# Altium PCB 2015_AX12DUPLICATOR.PcbDoc
Units mil, origin at the board's own origin, x right, y up, seen from the top; angles counter-clockwise.
Board outline 1318.9 x 1318.9 mil, 4 copper layers (1-TOP, 2-SIGNAL, 3-GND, 4-BOT), stack 68 mil thick; 16 components, 4 nets, 37 pads, 0 vias.
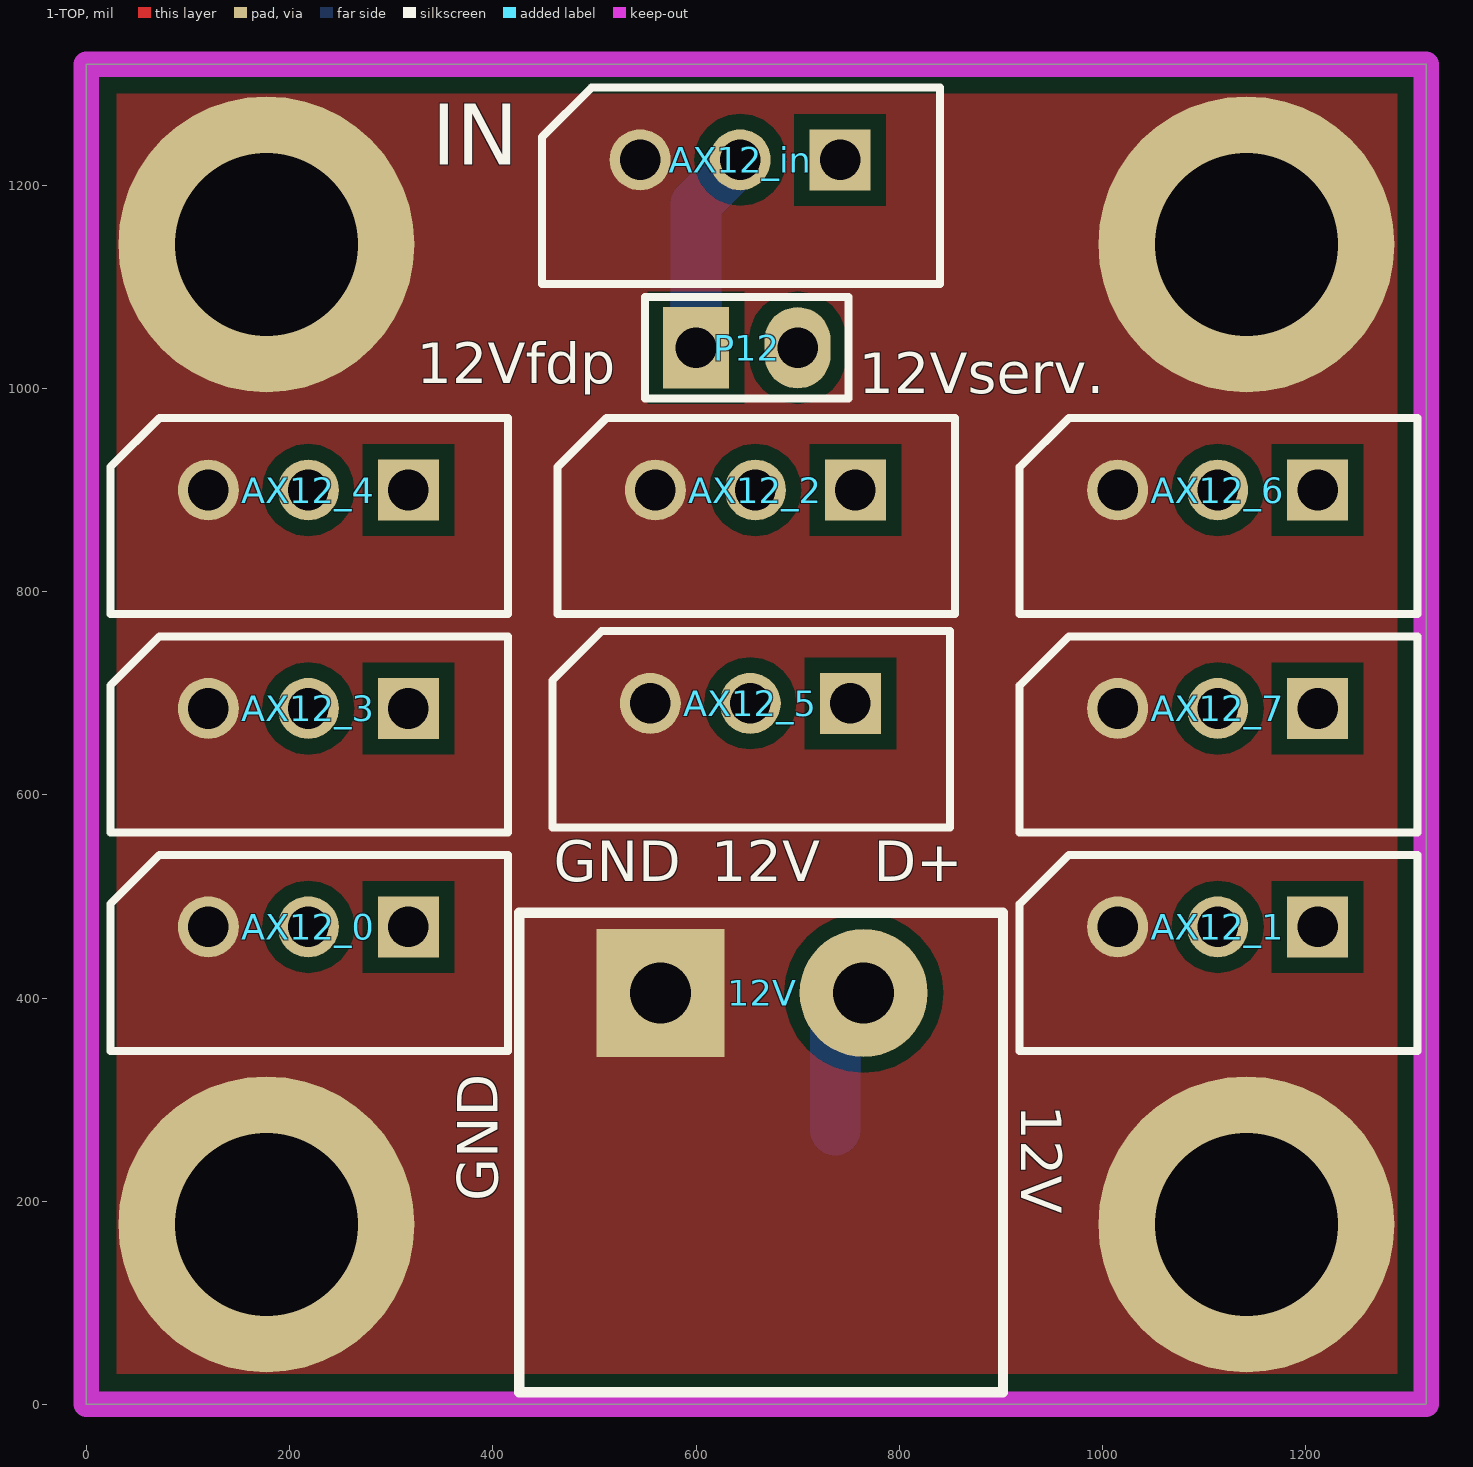
[diagram p0: 1-TOP view]
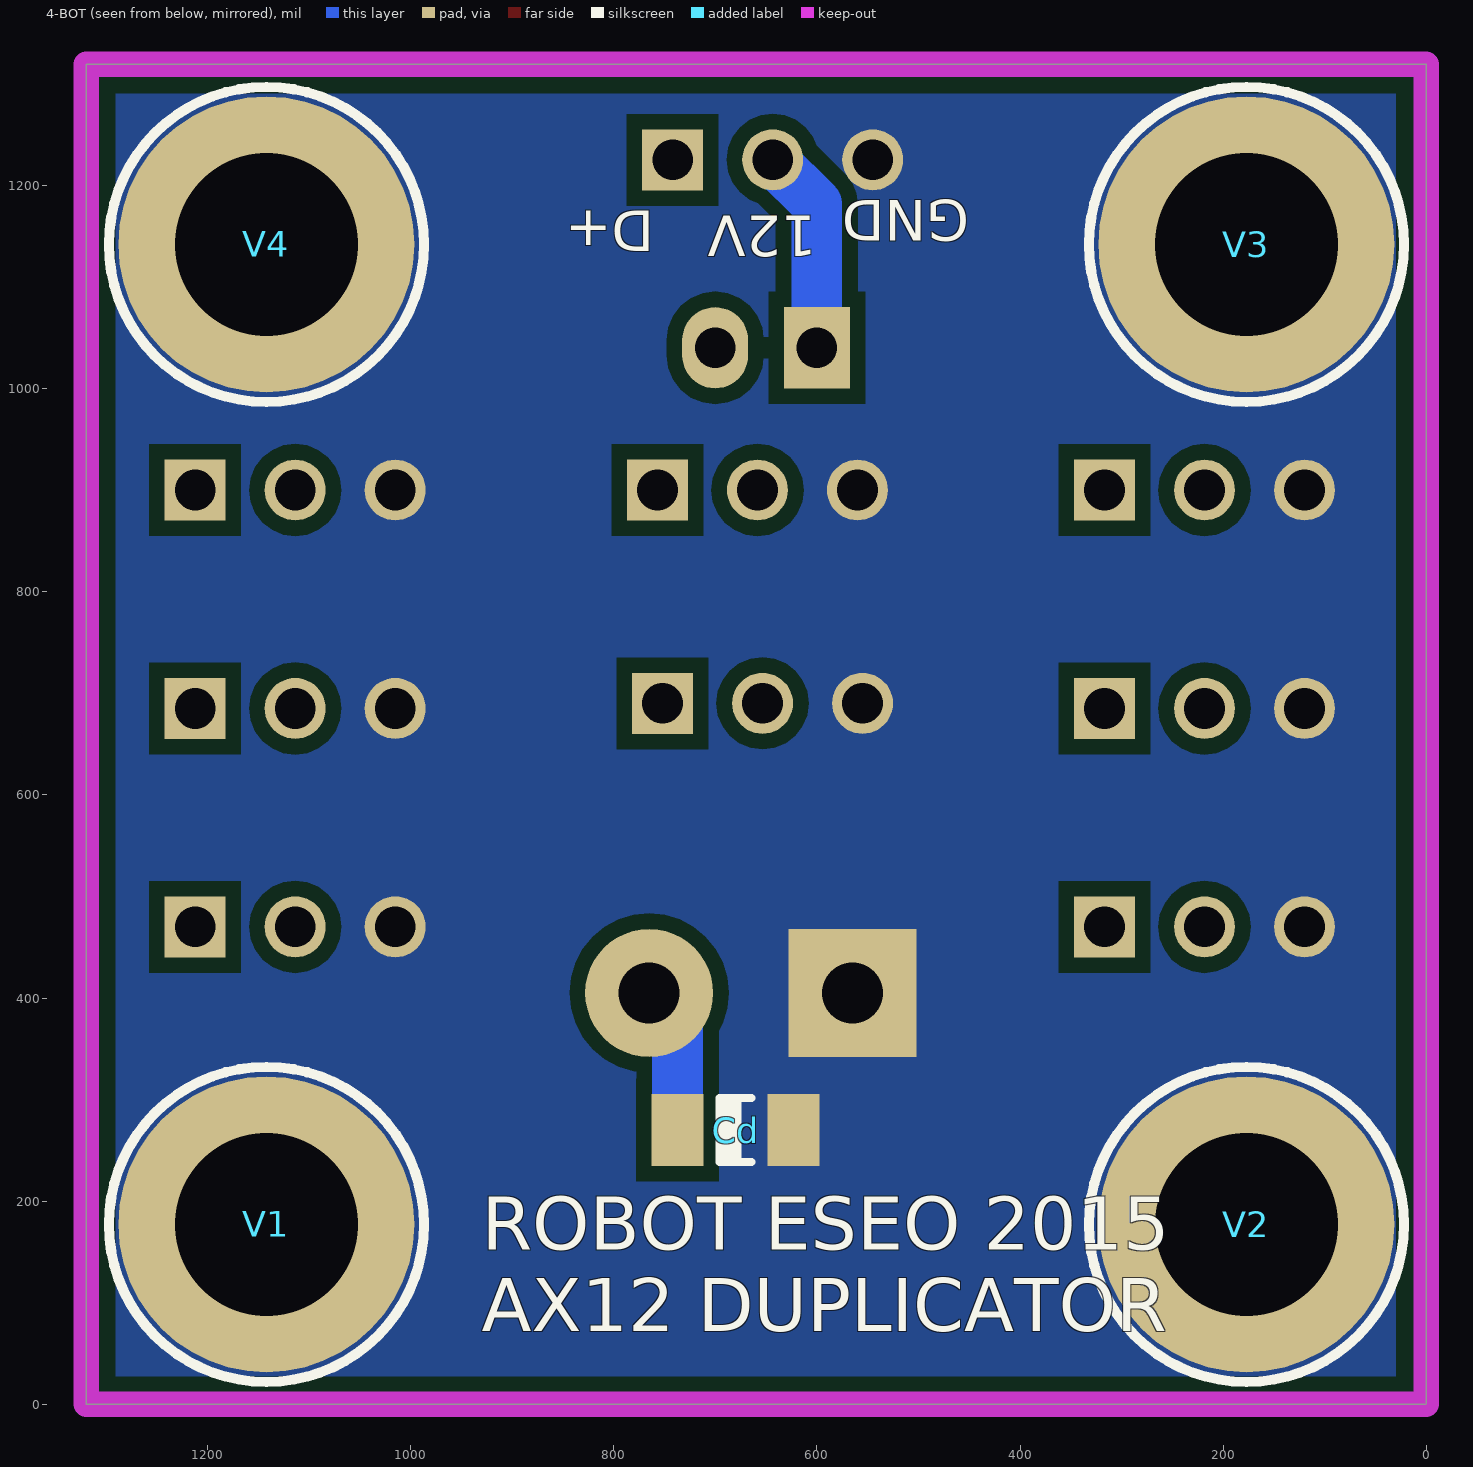
[diagram p1: 4-BOT view, seen from below]
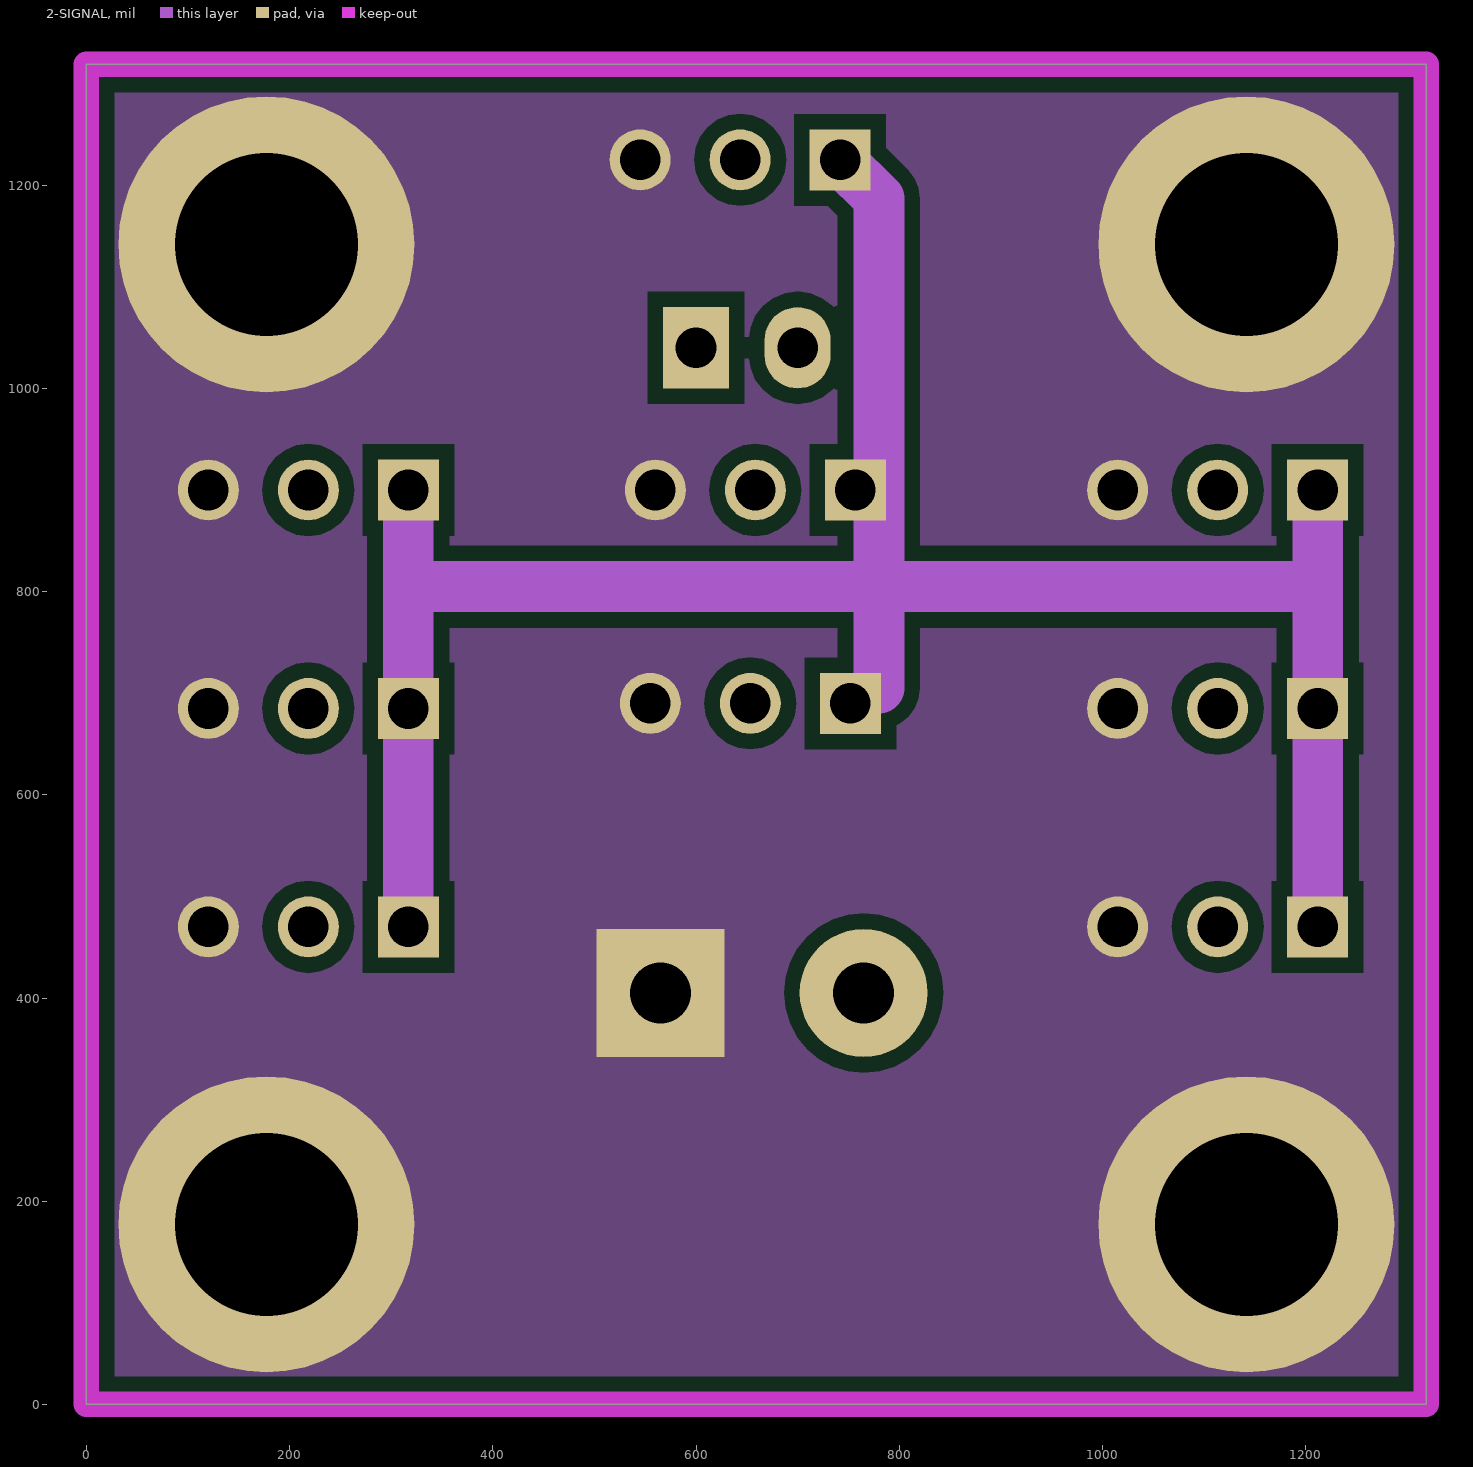
[diagram p2: 2-SIGNAL]
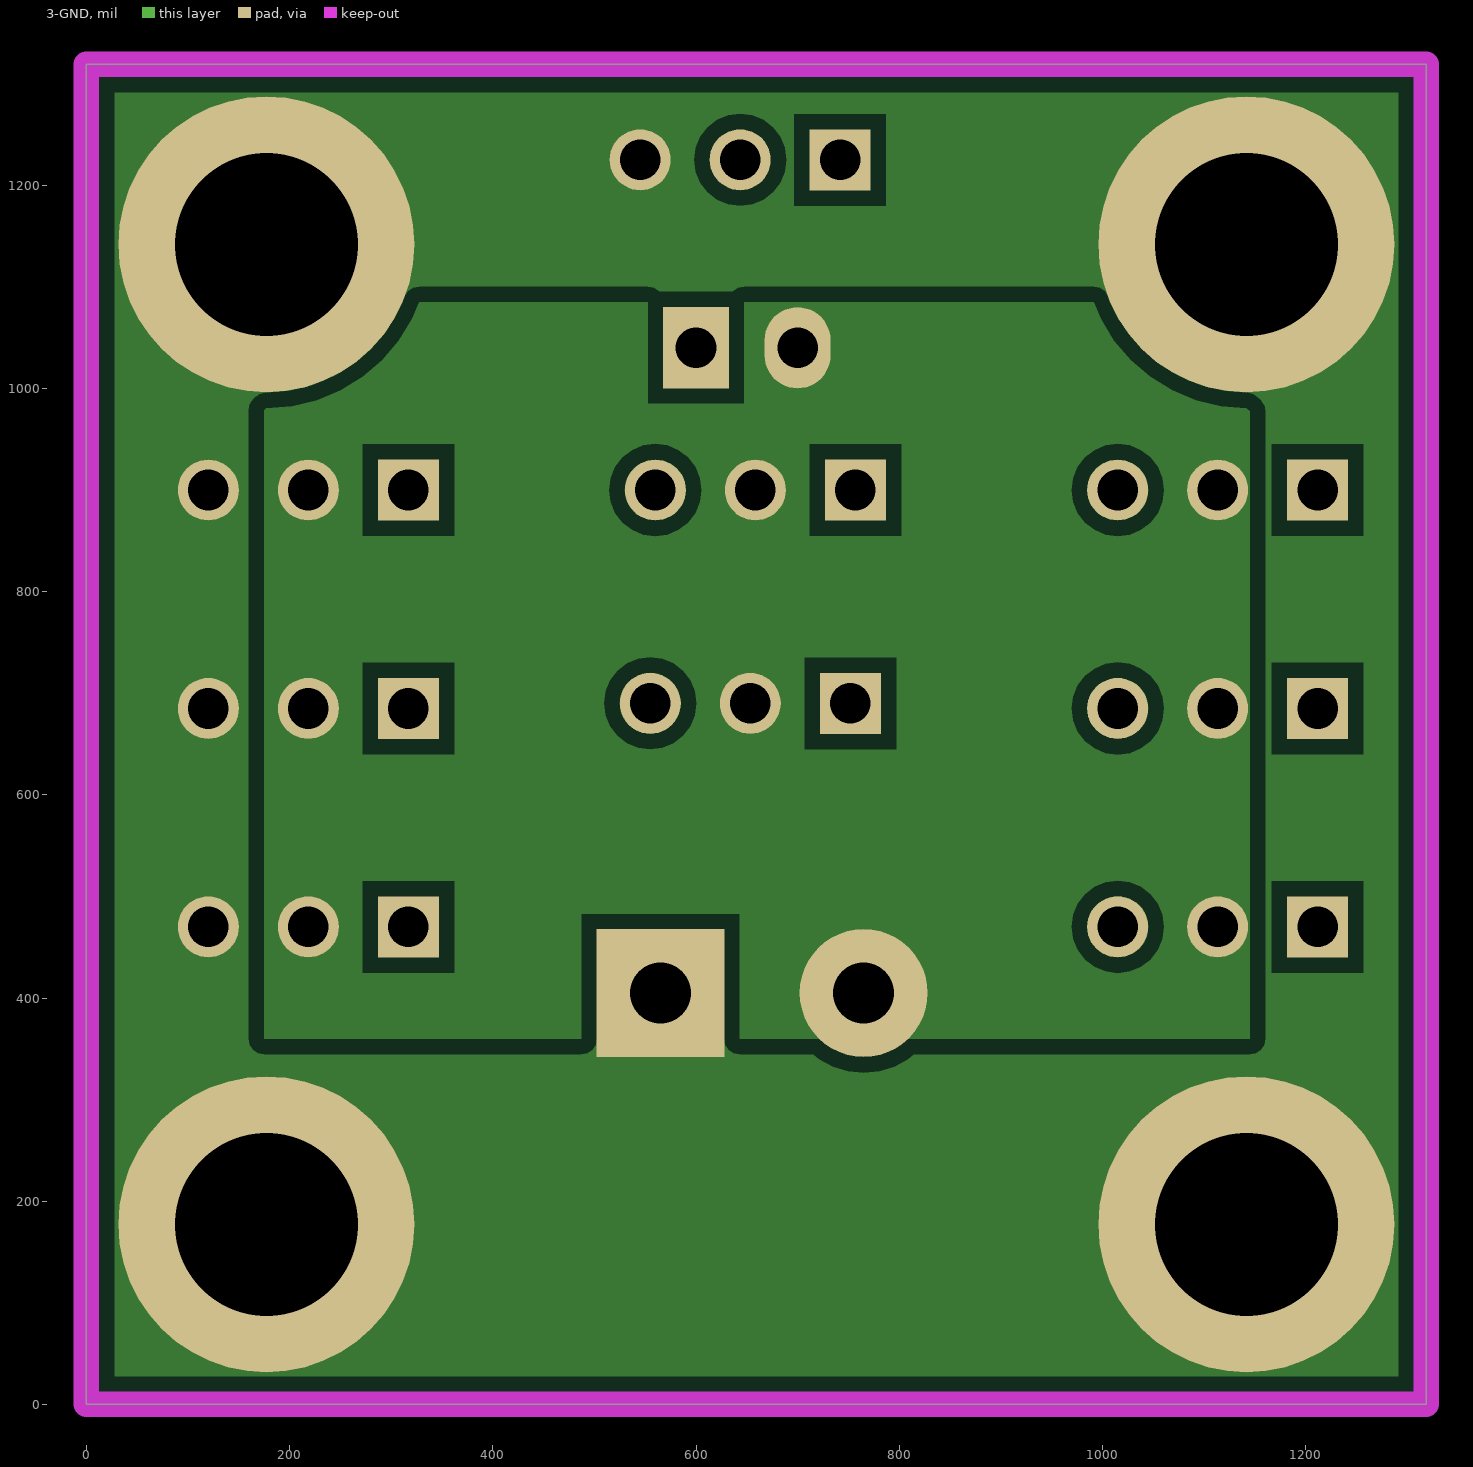
[diagram p3: 3-GND]
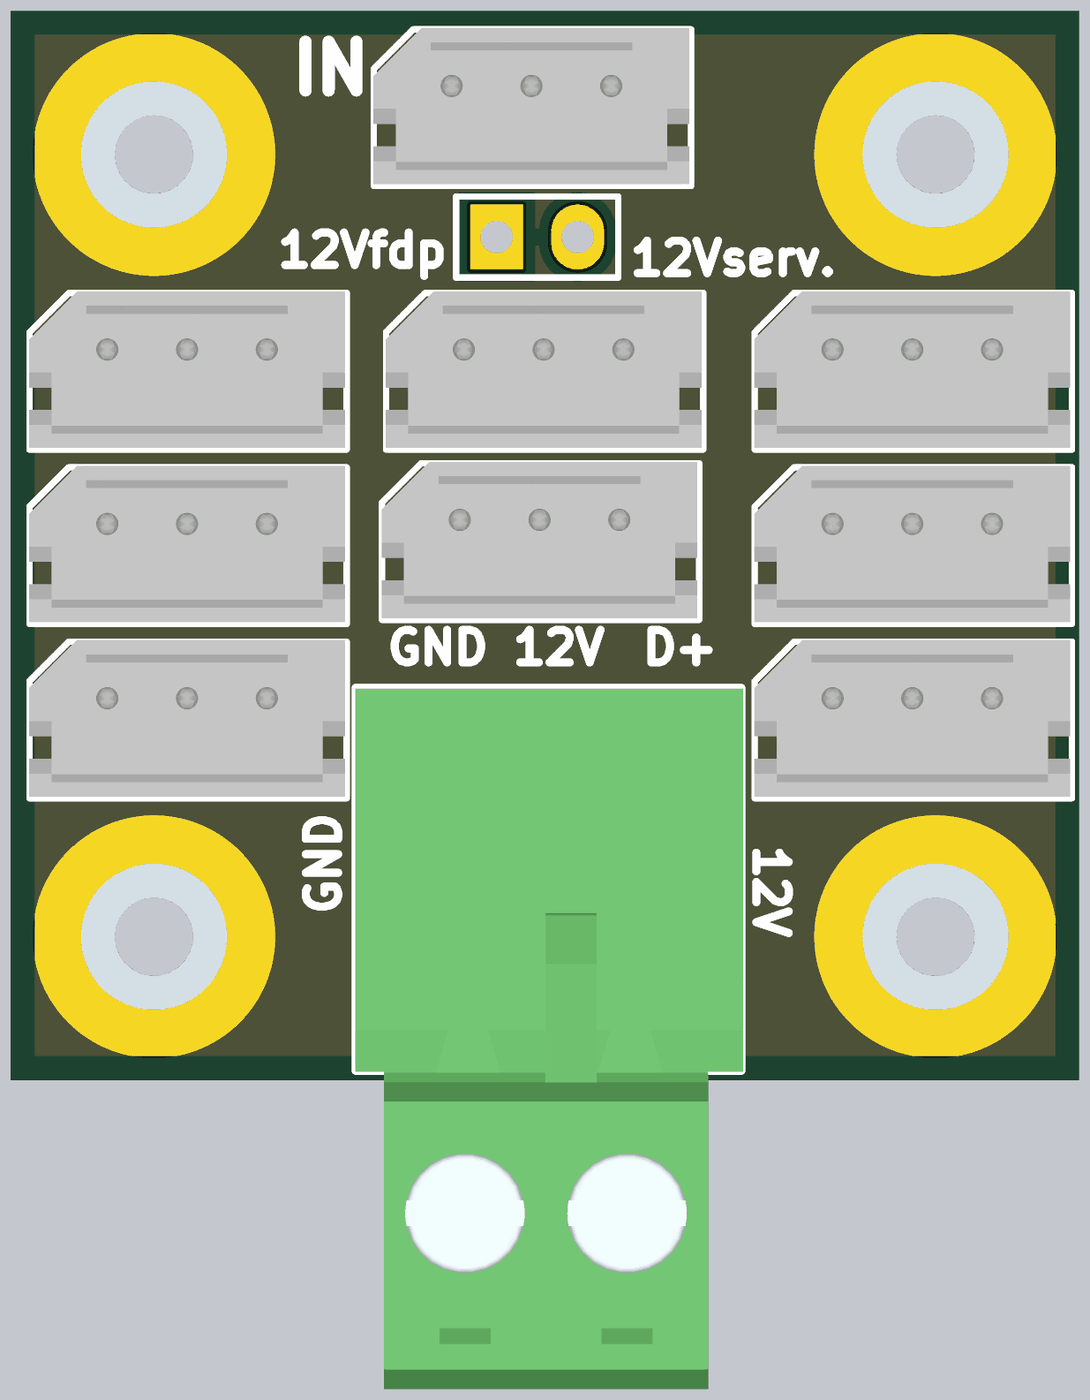
[diagram p4: 3D render of the assembled board from above, using the file's embedded part models]

## Layer stack, top to bottom
Top Solder: solder mask 0.4, Solder Resist, Dk 3.5
1-TOP: signal copper 1.4
Dielectric1: core 20.8, FR-4, Dk 4.8
2-SIGNAL: signal copper 1.4
Dielectric2: prepreg 20.8, FR-4, Dk 4.8
3-GND: signal copper 1.4
Dielectric3: core 20.8, FR-4, Dk 4.8
4-BOT: signal copper 1.4
Bottom Solder: solder mask 0.4, Solder Resist, Dk 3.5

## Board outline
0,0 1318.9,0 1318.9,1318.9 0,1318.9

## Design rules (kind name [scope] priority, off if disabled: settings)
Clearance Clearance_1 [InNamedPolygon('1-GND') Or  InNamedPolygon('2-GND') Or  InNamedPolygon('3-GND') Or InNamedPolygon('4-GND') Or InNamedPolygon('3-12V')] p1: gap=15
Clearance [All] p2: gap=7
FabricationTestpoint [(IsPad And (OnTopLayer Or OnBottomLayer))] p1: side=3 testpointundercomponent=TRUE minsize=40 maxsize=100 preferedsize=60 minholesize=0 maxholesize=40 preferedholesize=32 testpointgrid=1 allowsidetop=TRUE allowsidebottom=TRUE usegrid=TRUE gridtolerance=0.01
HoleSize [All] p1: absolutevalues=TRUE maxlimit=200 minlimit=1 maxpercent=80.000 minpercent=20.000
PlaneConnect [All] p1: planeconnectstyle=Direct reliefexpansion=20 reliefentries=4 reliefconductorwidth=10 reliefairgap=10
PolygonConnect [All] p1: connectstyle=Direct reliefconductorwidth=10 reliefentries=4 polygonreliefangle="90 Angle" airgapwidth=10
RoomDefinition 2015_AX12DUPLICATOR [InComponentClass('2015_AX12DUPLICATOR')] p1: confinementstyle=ConfineIn formatcopy=TRUE lockcomponents=FALSE outline 1310,920 1695,920 1695,260 1310,260
RoutingVias [All] p1: holewidth=28 width=50 viastyle="Through Hole" minholewidth=28 minwidth=50 maxholewidth=28 maxwidth=50
SilkToSolderMaskClearance SilkscreenOverComponentPads [IsPad] p1: minsilkscreentomaskgap=10 clearancetoexposedcopper=TRUE
SolderMaskExpansion [All] p1: expansion=4
Width [All] p1: maxlimit=200 minlimit=10 preferedwidth=15
25 further rules are at their usual default settings.

## Components (designator, comment, footprint, x,y, rotation, side; value= is the part's Value field where it differs from the comment)
12V "BARRETTE2" BORNIER2_HORIZ 765,405 r180 top
AX12_0 "MOLEX 22-03-5035" MOLEX3_2.5MM 120,470 r0 top
AX12_1 "MOLEX 22-03-5035" MOLEX3_2.5MM 1015,470 r0 top
AX12_2 "MOLEX 22-03-5035" MOLEX3_2.5MM 560,900 r0 top
AX12_3 "MOLEX 22-03-5035" MOLEX3_2.5MM 120,685 r0 top
AX12_4 "MOLEX 22-03-5035" MOLEX3_2.5MM 120,900 r0 top
AX12_5 "MOLEX 22-03-5035" MOLEX3_2.5MM 555,690 r0 top
AX12_6 "MOLEX 22-03-5035" MOLEX3_2.5MM 1015,900 r0 top
AX12_7 "MOLEX 22-03-5035" MOLEX3_2.5MM 1015,685 r0 top
AX12_in "MOLEX 22-03-5035" MOLEX3_2.5MM 545,1225 r0 top
Cd "10uF" C1206_N 680,270 r180 bottom
P12 "Jumper SIP 2.54" HDR1X2 600,1040 r0 top
V1 "Entretoise WURTH CMS" ENTRETOISE_CMS 1141.73,177.17 r180 bottom
V2 "Entretoise WURTH CMS" ENTRETOISE_CMS 177.17,177.17 r180 bottom
V3 "Entretoise WURTH CMS" ENTRETOISE_CMS 177.17,1141.73 r180 bottom
V4 "Entretoise WURTH CMS" ENTRETOISE_CMS 1141.73,1141.73 r180 bottom

## Footprints (in the part's own frame and the unit in brackets; to place one, negate y for a bottom-side part, rotate by r counter-clockwise, add the part's x,y. Pads: shape width x height; smd on the part's side, far side on the other; paste and mask are expansions set on the pad)
BORNIER2_HORIZ [mm] "Connector; Header; 2 Position; screw terminal blocks, Pin Spacing=5.08mm"
  rect 3.2x3.2 hole 1.524: 1(5.08,0)
  round 3.2 hole 1.524: 2(0,0)
  silkscreen extent -3.48,-2.01 8.61,9.98, body extent -3.54,-1.99 8.62,19.95, height 15.15
C1206_N [mm] "Chip Capacitor, Body 3.2x1.6mm, IPC Medium Density"
  rect 1.3x1.8 smd: 1(-1.45,0) 2(1.45,0)
  silkscreen extent -0.4,-0.8 0.4,0.8, body extent -1.57,-0.81 1.63,0.79, height 1.02
ENTRETOISE_CMS [mm] "Entretoise CMS Wurth trou 4.4mm"
  round 7.4 hole 4.572: 1(0,0)
  silkscreen extent -3.94,-3.94 3.94,3.94, body extent -2.99,-3 2.99,2.98, height 3
HDR1X2 [mil] "Connector; Header; 2 Position"
  rect 65x80 hole 40: 1(0,0)
  oval 65x80 hole 40: 2(100,0)
  silkscreen extent -50,-50 150,50
MOLEX3_2.5MM [mil] "Ref Molex : 22-03-5035 - 3 voies - 2.5mm"
  rect 60x60 hole 40: 1(196.85,0)
  round 60 hole 40: 2(98.43,0) 3(0,0)
  silkscreen extent -96,-122 295,71, body extent -97,-120 293,73, height 233

## Part data
12V: "Header, 2-Pin"
AX12_0 AX12_1 AX12_2 AX12_3 AX12_4 AX12_5 AX12_6 AX12_7 AX12_in: library part BARRETTE3, "Header, 3-Pin"
Cd: library part Condensateur, "Capacitor"
P12: library part "Jumper SIP2.54", "Jumper SIP2.54"
V1 V2 V3 V4: "Entretoise Wurth"

## Nets (pads, with @x,y where several pads share a name; then routed paths per layer and width w, separated by ;. In a path a pad name is that pad's centre, name@x,y a point inside that pad or via, vN(x,y) a via of type N, cw(c..) or ccw(c..) an arc to the next point about the centre after c; other vN are vias at no path point)
12V: 12V.2 AX12_0.2 AX12_1.2 AX12_2.2 AX12_3.2 AX12_4.2 AX12_5.2 AX12_6.2 AX12_7.2 Cd.1 P12.2 | length 134.5
  4-BOT w50: Cd.1 737.09,372.09 12V.2@760,395
12VFDP: AX12_in.2 P12.1 | length 208
  4-BOT w50: P12.1@600,1035 P12.1 600,1181.57 AX12_in.2
D+: AX12_0.1 AX12_1.1 AX12_2.1 AX12_3.1 AX12_4.1 AX12_5.1 AX12_6.1 AX12_7.1 AX12_in.1 | length 2294
  2-SIGNAL w50: AX12_0.1 AX12_3.1 316.85,805 ; AX12_4.1 316.85,805 ; AX12_in.1 780,1186.85 780,805 ; AX12_5.1@780,705 780,805 ; AX12_1.1@1211.85,466.85 AX12_1.1 AX12_7.1 1211.85,805 ; AX12_6.1 1211.85,805 ; 316.85,805 780,805 ; 780,805 1211.85,805
GND: 12V.1 AX12_0.3 AX12_1.3 AX12_2.3 AX12_3.3 AX12_4.3 AX12_5.3 AX12_6.3 AX12_7.3 AX12_in.3 Cd.2 V1.1 V2.1 V3.1 V4.1

## Polygon pours and split planes (outlines as drawn)
GND on 4-BOT "4-GND" (solid, pour order 6): 30,1290 1290,1290 1290,25 30,25
12V on 3-GND "3-12V" (solid, pour order 7): 175,1085 1145,1085 1145,360 175,360
GND on 3-GND "3-GND" (solid, pour order 9): 20,1297.74 1295,1297.74 1295,20 20,20
GND on 2-SIGNAL "2-GND" (solid, pour order 8): 20,1297.74 1295,1297.74 1295,20 20,20
GND on 1-TOP "1-GND" (solid, pour order 10): 30,1290 1290,1290 1290,30 30,30

## Keep-outs
Keep-Out Layer:
  the board outline again, w25

## Silkscreen, mask and mechanical layers (free items; w line width, h text height)
Top Overlay:
  text "IN" at 340,1220 h60
  text "12Vfdp" at 325,1005 h40
  text "12Vserv." at 760,995 h40
  text "GND" at 460,515 h40
  text "12V" at 615,515 h40
  text "D+" at 775,515 h40
  text "12V" at 920,295 h40 r270
  text "GND" at 405,200 h40 r90
Bottom Overlay:
  text "GND" at 450,1185 h40 r180
  text "D+" at 760,1175 h40 r180
  text "12V" at 600,1170 h40 r180
  text "ROBOT ESEO 2015" at 930,135 h90
  text "AX12 DUPLICATOR" at 930,55 h90